# EAGLE board untitled (EAGLE 7.2.0)
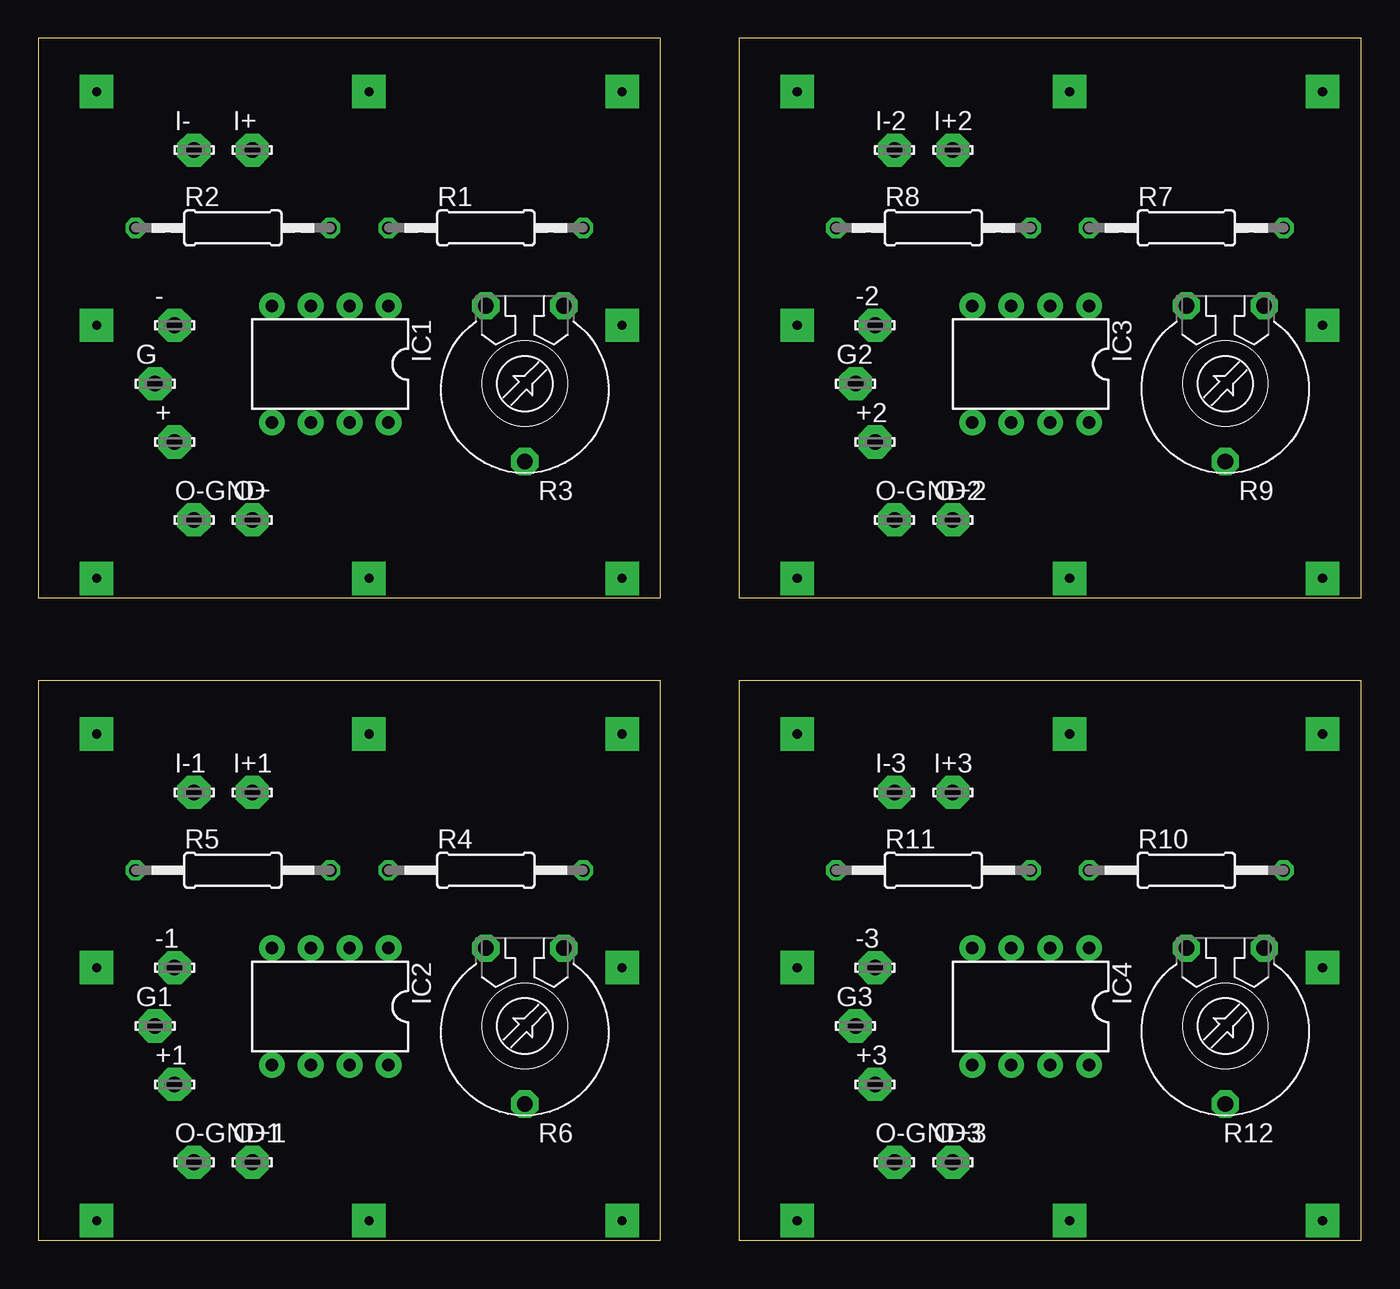
[diagram p0: board, top side]
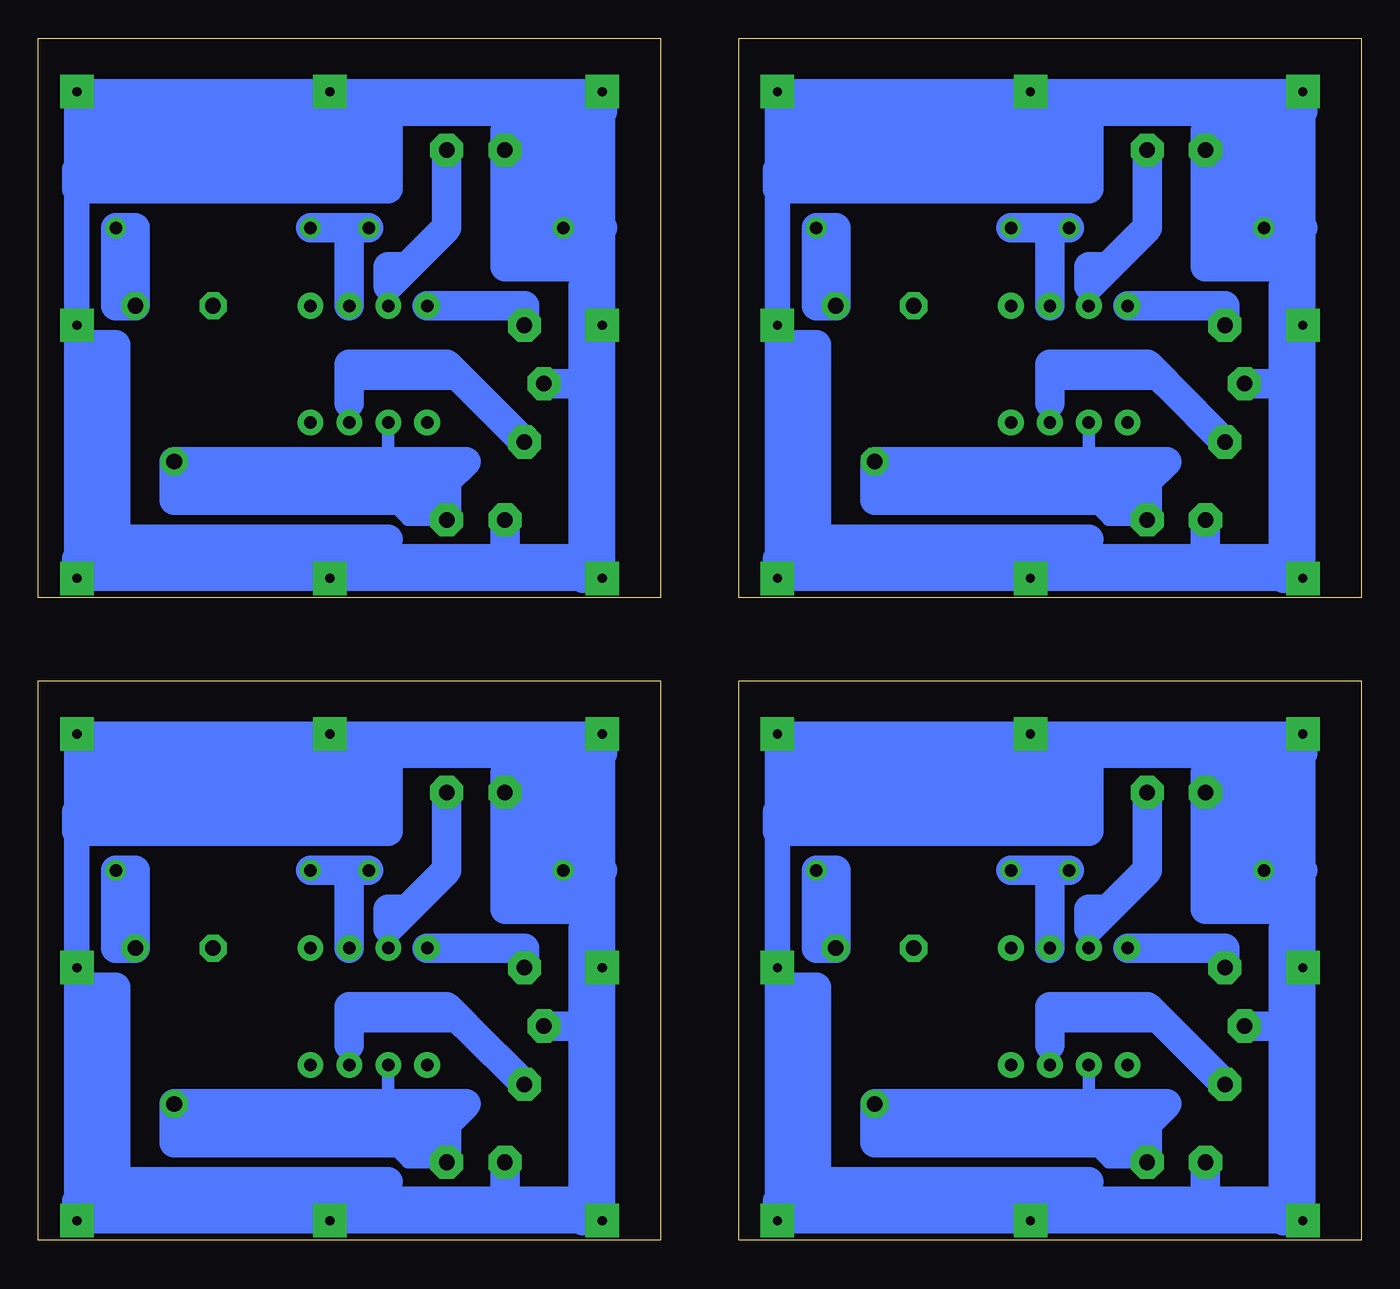
[diagram p1: board, bottom side, seen from below]

Size 86.34 x 78.41 mm. Coordinates in mm from the lower left corner, seen from the top.
Outline: 0,41.91 40.62,41.91 40.62,78.41 0,78.41 0,41.91
Outline: 0,0 40.62,0 40.62,36.5 0,36.5 0,0
Outline: 45.72,41.91 86.34,41.91 86.34,78.41 45.72,78.41 45.72,41.91
Outline: 45.72,0 86.34,0 86.34,36.5 45.72,36.5 45.72,0
Copper layers (1*16): Top 0.035mm / dielectric 1.5mm / Bottom 0.035mm
Design rules "default": minimum track width 10mil, minimum drill 24mil, track to track 8mil, track to pad 8mil, pad to pad 8mil, via to via 8mil, smd to smd 8mil, copper to edge 40mil, drill to drill 8mil, minimum pad ring 10mil, minimum via ring 8mil, stop-mask expansion 4mil, vias tented up to drill 0mil, thermal gap 10mil

## Footprints (pad centres in the part's own frame; a part is rotated, then mirrored left to right if it is on the bottom)
LSP10 = drill 1.016 pad 2.159 octagon: MP 0,0
DIL08 = drill 0.813 pad 1.676: 1 -3.81,-3.81; 2 -1.27,-3.81; 3 1.27,-3.81; 4 3.81,-3.81; 5 3.81,3.81; 6 1.27,3.81; 7 -1.27,3.81; 8 -3.81,3.81
0207/12 = drill 0.813 octagon: 1 -6.35,0; 2 6.35,0
PT-10 = drill 1.016 pad 1.778 octagon: 1 -2.54,-5.08; 2 2.54,-5.08; 3 0,5.08

## Placement (x,y rotation side)
+  LSP10  [LSP10]  8.89,52.07 0 top
+1  LSP10  [LSP10]  8.89,10.16 0 top
+2  LSP10  [LSP10]  54.61,52.07 0 top
+3  LSP10  [LSP10]  54.61,10.16 0 top
-  LSP10  [LSP10]  8.89,59.69 0 top
-1  LSP10  [LSP10]  8.89,17.78 0 top
-2  LSP10  [LSP10]  54.61,59.69 0 top
-3  LSP10  [LSP10]  54.61,17.78 0 top
G  LSP10  [LSP10]  7.62,55.88 0 top
G1  LSP10  [LSP10]  7.62,13.97 0 top
G2  LSP10  [LSP10]  53.34,55.88 0 top
G3  LSP10  [LSP10]  53.34,13.97 0 top
I+  LSP10  [LSP10]  13.97,71.12 0 top
I+1  LSP10  [LSP10]  13.97,29.21 0 top
I+2  LSP10  [LSP10]  59.69,71.12 0 top
I+3  LSP10  [LSP10]  59.69,29.21 0 top
I-  LSP10  [LSP10]  10.16,71.12 0 top
I-1  LSP10  [LSP10]  10.16,29.21 0 top
I-2  LSP10  [LSP10]  55.88,71.12 0 top
I-3  LSP10  [LSP10]  55.88,29.21 0 top
IC1  LM741P  [DIL08]  19.05,57.15 180 top
IC2  LM741P  [DIL08]  19.05,15.24 180 top
IC3  LM741P  [DIL08]  64.77,57.15 180 top
IC4  LM741P  [DIL08]  64.77,15.24 180 top
O+  LSP10  [LSP10]  13.97,46.99 0 top
O+1  LSP10  [LSP10]  13.97,5.08 0 top
O+2  LSP10  [LSP10]  59.69,46.99 0 top
O+3  LSP10  [LSP10]  59.69,5.08 0 top
O-GND  LSP10  [LSP10]  10.16,46.99 0 top
O-GND1  LSP10  [LSP10]  10.16,5.08 0 top
O-GND2  LSP10  [LSP10]  55.88,46.99 0 top
O-GND3  LSP10  [LSP10]  55.88,5.08 0 top
R1  68K  [0207/12]  29.21,66.04 0 top
R2  1K2  [0207/12]  12.7,66.04 0 top
R3  47K  [PT-10]  31.75,55.88 180 top
R4  68K  [0207/12]  29.21,24.13 0 top
R5  1K2  [0207/12]  12.7,24.13 0 top
R6  47K  [PT-10]  31.75,13.97 180 top
R7  68K  [0207/12]  74.93,66.04 0 top
R8  1K2  [0207/12]  58.42,66.04 0 top
R9  47K  [PT-10]  77.47,55.88 180 top
R10  68K  [0207/12]  74.93,24.13 0 top
R11  1K2  [0207/12]  58.42,24.13 0 top
R12  47K  [PT-10]  77.47,13.97 180 top

## Library data of the parts
+ +1-+3 - -1--3 G G1-G3 I+ I+1-I+3 I- I-1-I-3 O+ O+1-O+3 O-GND O-GND1-O-GND3 = solpad
IC1-IC4 = linear
R1 R2 R4 R5 R7 R8 R10 R11 = resistor
R3 R6 R9 R12 = rcl

## Nets
+12V: +.MP IC1.7
+12V1: +1.MP IC2.7
+12V2: +2.MP IC3.7
+12V3: +3.MP IC4.7
-12V: -.MP IC1.4
-12V1: -1.MP IC2.4
-12V2: -2.MP IC3.4
-12V3: -3.MP IC4.4
N$1: IC1.2 R1.1 R2.2
N$2: R1.2 R3.1
N$3: IC1.6 O+.MP R3.3
N$4: I+.MP IC1.3
N$5: G.MP I-.MP O-GND.MP R2.1
N$7: IC2.2 R4.1 R5.2
N$8: R4.2 R6.1
N$9: IC2.6 O+1.MP R6.3
N$10: I+1.MP IC2.3
N$12: G1.MP I-1.MP O-GND1.MP R5.1
N$13: IC3.2 R7.1 R8.2
N$14: R7.2 R9.1
N$15: IC3.6 O+2.MP R9.3
N$16: I+2.MP IC3.3
N$18: G2.MP I-2.MP O-GND2.MP R8.1
N$19: IC4.2 R10.1 R11.2
N$20: R10.2 R12.1
N$21: IC4.6 O+3.MP R12.3
N$22: I+3.MP IC4.3
N$24: G3.MP I-3.MP O-GND3.MP R11.1

## Tracks (layer width: path | path; a pad name or v marks a point on that pad's centre or on a via)
+12V
  Bottom 0.813: IC1.7 20.32,54.61 20.32,55.88 12.7,55.88
  Bottom 1.93: +.MP 12.7,55.88 13.97,57.15 20.32,57.15 20.32,54.61
+12V1
  Bottom 0.813: IC2.7 20.32,12.7 20.32,13.97 12.7,13.97
  Bottom 1.93: +1.MP 12.7,13.97 13.97,15.24 20.32,15.24 20.32,12.7
+12V2
  Bottom 0.813: IC3.7 66.04,54.61 66.04,55.88 58.42,55.88
  Bottom 1.93: +2.MP 58.42,55.88 59.69,57.15 66.04,57.15 66.04,54.61
+12V3
  Bottom 0.813: IC4.7 66.04,12.7 66.04,13.97 58.42,13.97
  Bottom 1.93: +3.MP 58.42,13.97 59.69,15.24 66.04,15.24 66.04,12.7
-12V
  Bottom 1.93: IC1.4 8.89,60.96 -.MP
-12V1
  Bottom 1.93: IC2.4 8.89,19.05 -1.MP
-12V2
  Bottom 1.93: IC3.4 54.61,60.96 -2.MP
-12V3
  Bottom 1.93: IC4.4 54.61,19.05 -3.MP
N$1
  Bottom 1.93: R2.2 20.32,66.04 | 20.32,66.04 R1.1 | IC1.2 20.32,66.04
N$2
  Bottom 0.813: 34.29,64.77 R1.2
  Bottom 1.93: R1.2 34.29,66.04 34.29,64.77 R3.1 35.56,60.96 R1.2
N$3
  Bottom 0.813: O+.MP 16.51,46.99 17.78,48.26 17.78,50.8 IC1.6 | 31.75,49.53 30.48,48.26
  Bottom 1.93: 15.24,48.26 17.78,48.26 20.32,48.26 | 20.32,48.26 30.48,48.26 31.75,48.26 31.75,49.53 | 15.24,48.26 17.78,50.8 | 17.78,50.8 19.05,49.53 | 20.32,48.26 19.05,49.53 | 19.05,49.53 31.75,49.53 | 31.75,49.53 R3.3 17.78,50.8 | 17.78,50.8 12.7,50.8 13.97,49.53 O+.MP 15.24,48.26 | 15.24,48.26 15.24,49.53
N$4
  Bottom 0.813: 17.78,62.23 IC1.3
  Bottom 1.93: I+.MP 13.97,66.04 16.51,63.5 | 16.51,63.5 17.78,63.5 17.78,62.23 16.51,63.5
N$5  (via drill 0.6 pad 2.18)
  Bottom 0.813: 10.16,72.39 10.16,74.93 v38.1,74.93 | 38.1,44.45 38.1,69.85 | 5.08,55.88 3.81,55.88 | R2.1 5.08,66.04 | 10.16,44.45 10.16,43.18
  Bottom 1.676: v3.81,74.93 10.16,74.93 v21.59,74.93 v38.1,74.93 38.1,69.85 v38.1,59.69 38.1,44.45 v38.1,43.18 v21.59,43.18 10.16,43.18 5.08,43.18 v3.81,43.18 3.81,55.88 v3.81,59.69 3.81,66.04 3.81,73.66 v3.81,74.93
  Bottom 1.93: 8.89,73.66 17.78,73.66 | 17.78,73.66 17.78,72.39 | 17.78,72.39 17.78,71.12 | 17.78,71.12 17.78,68.58 38.1,68.58 38.1,69.85 19.05,69.85 | 3.81,73.66 7.62,73.66 7.62,64.77 | 3.81,66.04 5.08,66.04 | 5.08,66.04 5.08,72.39 6.35,72.39 6.35,63.5 | 6.35,63.5 5.08,63.5 5.08,66.04 | 5.08,59.69 5.08,55.88 | 5.08,55.88 5.08,44.45 | 5.08,44.45 5.08,43.18 | 5.08,44.45 10.16,44.45 | 10.16,44.45 35.56,44.45 | 38.1,44.45 35.56,44.45 | 35.56,44.45 35.56,58.42 36.83,58.42 36.83,45.72 17.78,45.72 | O-GND.MP 10.16,44.45 | 10.16,72.39 I-.MP 10.16,63.5 6.35,63.5 | v3.81,59.69 5.08,59.69 | 5.08,59.69 5.08,62.23 | 17.78,71.12 36.83,71.12 | 17.78,72.39 36.83,72.39 | 17.78,73.66 36.83,73.66 | G.MP 5.08,55.88
N$6
  Bottom 1.93: 8.89,64.77 8.89,72.39
N$7
  Bottom 1.93: R5.2 20.32,24.13 | 20.32,24.13 R4.1 | IC2.2 20.32,24.13
N$8
  Bottom 0.813: 34.29,22.86 R4.2
  Bottom 1.93: R4.2 34.29,24.13 34.29,22.86 R6.1 35.56,19.05 R4.2
N$9
  Bottom 0.813: O+1.MP 16.51,5.08 17.78,6.35 17.78,8.89 IC2.6 | 31.75,7.62 30.48,6.35
  Bottom 1.93: 15.24,6.35 17.78,6.35 20.32,6.35 | 20.32,6.35 30.48,6.35 31.75,6.35 31.75,7.62 | 15.24,6.35 17.78,8.89 | 17.78,8.89 19.05,7.62 | 20.32,6.35 19.05,7.62 | 19.05,7.62 31.75,7.62 | 31.75,7.62 R6.3 17.78,8.89 | 17.78,8.89 12.7,8.89 13.97,7.62 O+1.MP 15.24,6.35 | 15.24,6.35 15.24,7.62
N$10
  Bottom 0.813: 17.78,20.32 IC2.3
  Bottom 1.93: I+1.MP 13.97,24.13 16.51,21.59 | 16.51,21.59 17.78,21.59 17.78,20.32 16.51,21.59
N$11
  Bottom 1.93: 8.89,22.86 8.89,30.48
N$12  (via drill 0.6 pad 2.18)
  Bottom 0.813: 10.16,30.48 10.16,33.02 v38.1,33.02 | 38.1,2.54 38.1,27.94 | 5.08,13.97 3.81,13.97 | R5.1 5.08,24.13 | 10.16,2.54 10.16,1.27
  Bottom 1.676: v3.81,33.02 10.16,33.02 v21.59,33.02 v38.1,33.02 38.1,27.94 v38.1,17.78 38.1,2.54 v38.1,1.27 v21.59,1.27 10.16,1.27 5.08,1.27 v3.81,1.27 3.81,13.97 v3.81,17.78 3.81,24.13 3.81,31.75 v3.81,33.02
  Bottom 1.93: 8.89,31.75 17.78,31.75 | 17.78,31.75 17.78,30.48 | 17.78,30.48 17.78,29.21 | 17.78,29.21 17.78,26.67 38.1,26.67 38.1,27.94 19.05,27.94 | 3.81,31.75 7.62,31.75 7.62,22.86 | 3.81,24.13 5.08,24.13 | 5.08,24.13 5.08,30.48 6.35,30.48 6.35,21.59 | 6.35,21.59 5.08,21.59 5.08,24.13 | 5.08,17.78 5.08,13.97 | 5.08,13.97 5.08,2.54 | 5.08,2.54 5.08,1.27 | 5.08,2.54 10.16,2.54 | 10.16,2.54 35.56,2.54 | 38.1,2.54 35.56,2.54 | 35.56,2.54 35.56,16.51 36.83,16.51 36.83,3.81 17.78,3.81 | O-GND1.MP 10.16,2.54 | 10.16,30.48 I-1.MP 10.16,21.59 6.35,21.59 | v3.81,17.78 5.08,17.78 | 5.08,17.78 5.08,20.32 | 17.78,29.21 36.83,29.21 | 17.78,30.48 36.83,30.48 | 17.78,31.75 36.83,31.75 | G1.MP 5.08,13.97
N$13
  Bottom 1.93: R8.2 66.04,66.04 | 66.04,66.04 R7.1 | IC3.2 66.04,66.04
N$14
  Bottom 0.813: 80.01,64.77 R7.2
  Bottom 1.93: R7.2 80.01,66.04 80.01,64.77 R9.1 81.28,60.96 R7.2
N$15
  Bottom 0.813: O+2.MP 62.23,46.99 63.5,48.26 63.5,50.8 IC3.6 | 77.47,49.53 76.2,48.26
  Bottom 1.93: 60.96,48.26 63.5,48.26 66.04,48.26 | 66.04,48.26 76.2,48.26 77.47,48.26 77.47,49.53 | 60.96,48.26 63.5,50.8 | 63.5,50.8 64.77,49.53 | 66.04,48.26 64.77,49.53 | 64.77,49.53 77.47,49.53 | 77.47,49.53 R9.3 63.5,50.8 | 63.5,50.8 58.42,50.8 59.69,49.53 O+2.MP 60.96,48.26 | 60.96,48.26 60.96,49.53
N$16
  Bottom 0.813: 63.5,62.23 IC3.3
  Bottom 1.93: I+2.MP 59.69,66.04 62.23,63.5 | 62.23,63.5 63.5,63.5 63.5,62.23 62.23,63.5
N$17
  Bottom 1.93: 54.61,64.77 54.61,72.39
N$18  (via drill 0.6 pad 2.18)
  Bottom 0.813: 55.88,72.39 55.88,74.93 v83.82,74.93 | 83.82,44.45 83.82,69.85 | 50.8,55.88 49.53,55.88 | R8.1 50.8,66.04 | 55.88,44.45 55.88,43.18
  Bottom 1.676: v49.53,74.93 55.88,74.93 v67.31,74.93 v83.82,74.93 83.82,69.85 v83.82,59.69 83.82,44.45 v83.82,43.18 v67.31,43.18 55.88,43.18 50.8,43.18 v49.53,43.18 49.53,55.88 v49.53,59.69 49.53,66.04 49.53,73.66 v49.53,74.93
  Bottom 1.93: 54.61,73.66 63.5,73.66 | 63.5,73.66 63.5,72.39 | 63.5,72.39 63.5,71.12 | 63.5,71.12 63.5,68.58 83.82,68.58 83.82,69.85 64.77,69.85 | 49.53,73.66 53.34,73.66 53.34,64.77 | 49.53,66.04 50.8,66.04 | 50.8,66.04 50.8,72.39 52.07,72.39 52.07,63.5 | 52.07,63.5 50.8,63.5 50.8,66.04 | 50.8,59.69 50.8,55.88 | 50.8,55.88 50.8,44.45 | 50.8,44.45 50.8,43.18 | 50.8,44.45 55.88,44.45 | 55.88,44.45 81.28,44.45 | 83.82,44.45 81.28,44.45 | 81.28,44.45 81.28,58.42 82.55,58.42 82.55,45.72 63.5,45.72 | O-GND2.MP 55.88,44.45 | 55.88,72.39 I-2.MP 55.88,63.5 52.07,63.5 | v49.53,59.69 50.8,59.69 | 50.8,59.69 50.8,62.23 | 63.5,71.12 82.55,71.12 | 63.5,72.39 82.55,72.39 | 63.5,73.66 82.55,73.66 | G2.MP 50.8,55.88
N$19
  Bottom 1.93: R11.2 66.04,24.13 | 66.04,24.13 R10.1 | IC4.2 66.04,24.13
N$20
  Bottom 0.813: 80.01,22.86 R10.2
  Bottom 1.93: R10.2 80.01,24.13 80.01,22.86 R12.1 81.28,19.05 R10.2
N$21
  Bottom 0.813: O+3.MP 62.23,5.08 63.5,6.35 63.5,8.89 IC4.6 | 77.47,7.62 76.2,6.35
  Bottom 1.93: 60.96,6.35 63.5,6.35 66.04,6.35 | 66.04,6.35 76.2,6.35 77.47,6.35 77.47,7.62 | 60.96,6.35 63.5,8.89 | 63.5,8.89 64.77,7.62 | 66.04,6.35 64.77,7.62 | 64.77,7.62 77.47,7.62 | 77.47,7.62 R12.3 63.5,8.89 | 63.5,8.89 58.42,8.89 59.69,7.62 O+3.MP 60.96,6.35 | 60.96,6.35 60.96,7.62
N$22
  Bottom 0.813: 63.5,20.32 IC4.3
  Bottom 1.93: I+3.MP 59.69,24.13 62.23,21.59 | 62.23,21.59 63.5,21.59 63.5,20.32 62.23,21.59
N$23
  Bottom 1.93: 54.61,22.86 54.61,30.48
N$24  (via drill 0.6 pad 2.18)
  Bottom 0.813: 55.88,30.48 55.88,33.02 v83.82,33.02 | 83.82,2.54 83.82,27.94 | 50.8,13.97 49.53,13.97 | R11.1 50.8,24.13 | 55.88,2.54 55.88,1.27
  Bottom 1.676: v49.53,33.02 55.88,33.02 v67.31,33.02 v83.82,33.02 83.82,27.94 v83.82,17.78 83.82,2.54 v83.82,1.27 v67.31,1.27 55.88,1.27 50.8,1.27 v49.53,1.27 49.53,13.97 v49.53,17.78 49.53,24.13 49.53,31.75 v49.53,33.02
  Bottom 1.93: 54.61,31.75 63.5,31.75 | 63.5,31.75 63.5,30.48 | 63.5,30.48 63.5,29.21 | 63.5,29.21 63.5,26.67 83.82,26.67 83.82,27.94 64.77,27.94 | 49.53,31.75 53.34,31.75 53.34,22.86 | 49.53,24.13 50.8,24.13 | 50.8,24.13 50.8,30.48 52.07,30.48 52.07,21.59 | 52.07,21.59 50.8,21.59 50.8,24.13 | 50.8,17.78 50.8,13.97 | 50.8,13.97 50.8,2.54 | 50.8,2.54 50.8,1.27 | 50.8,2.54 55.88,2.54 | 55.88,2.54 81.28,2.54 | 83.82,2.54 81.28,2.54 | 81.28,2.54 81.28,16.51 82.55,16.51 82.55,3.81 63.5,3.81 | O-GND3.MP 55.88,2.54 | 55.88,30.48 I-3.MP 55.88,21.59 52.07,21.59 | v49.53,17.78 50.8,17.78 | 50.8,17.78 50.8,20.32 | 63.5,29.21 82.55,29.21 | 63.5,30.48 82.55,30.48 | 63.5,31.75 82.55,31.75 | G3.MP 50.8,13.97